# Altium PCB CtrlBoxV2.PcbDoc
Units mil, origin at the board's own origin, x right, y up, seen from the top; angles counter-clockwise.
Board outline 2165.35 x 2165.35 mil, 2 copper layers (Component Side, Bottom Layer), stack 65.756 mil thick; 29 components, 27 nets, 116 pads, 11 vias.
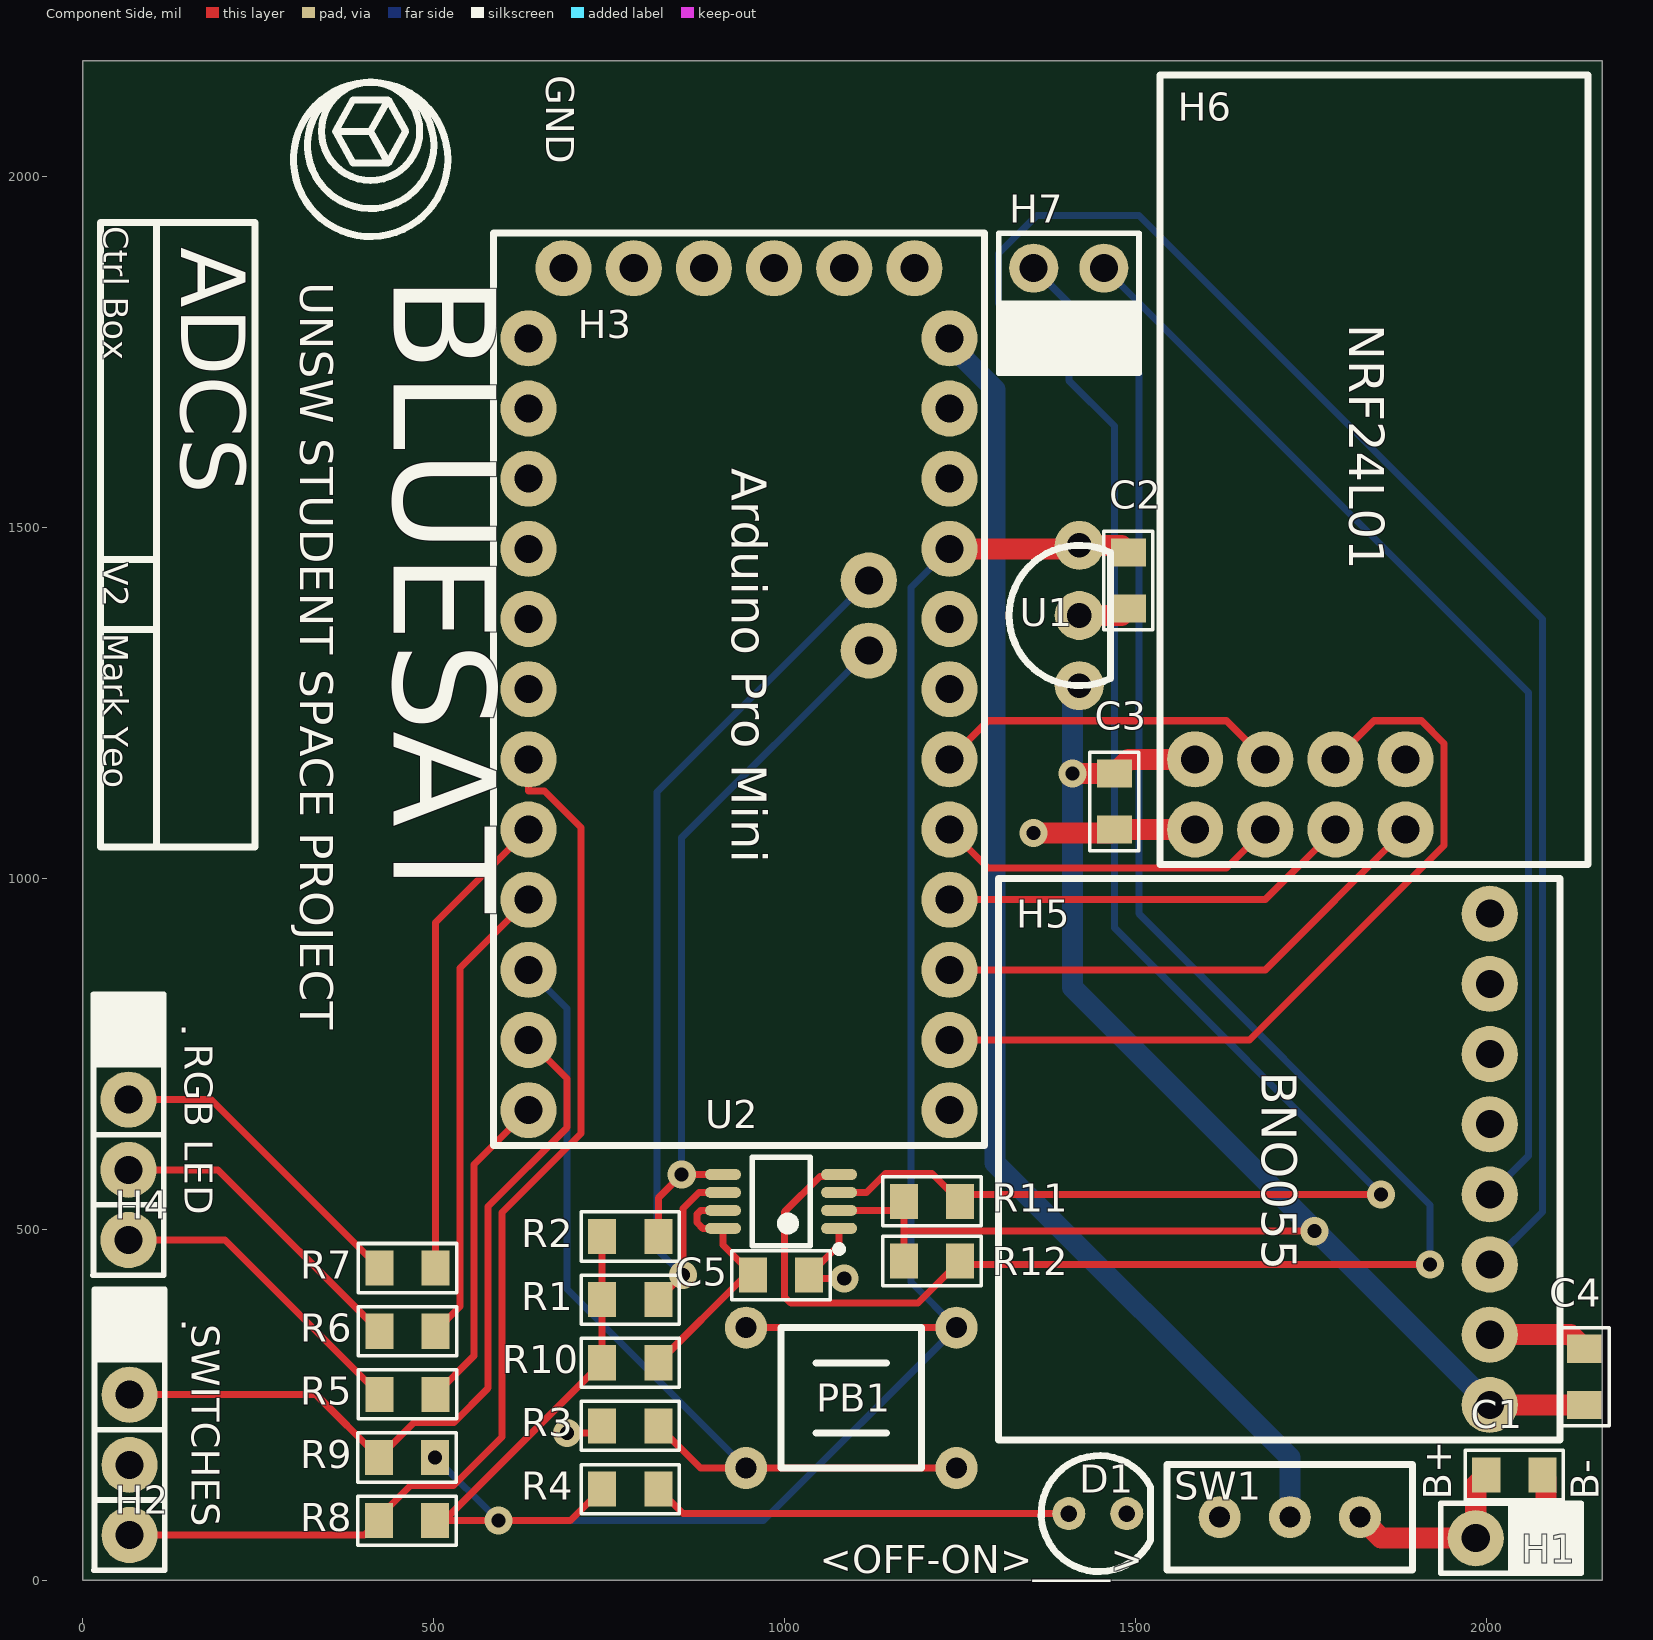
[diagram p0: Component Side view]
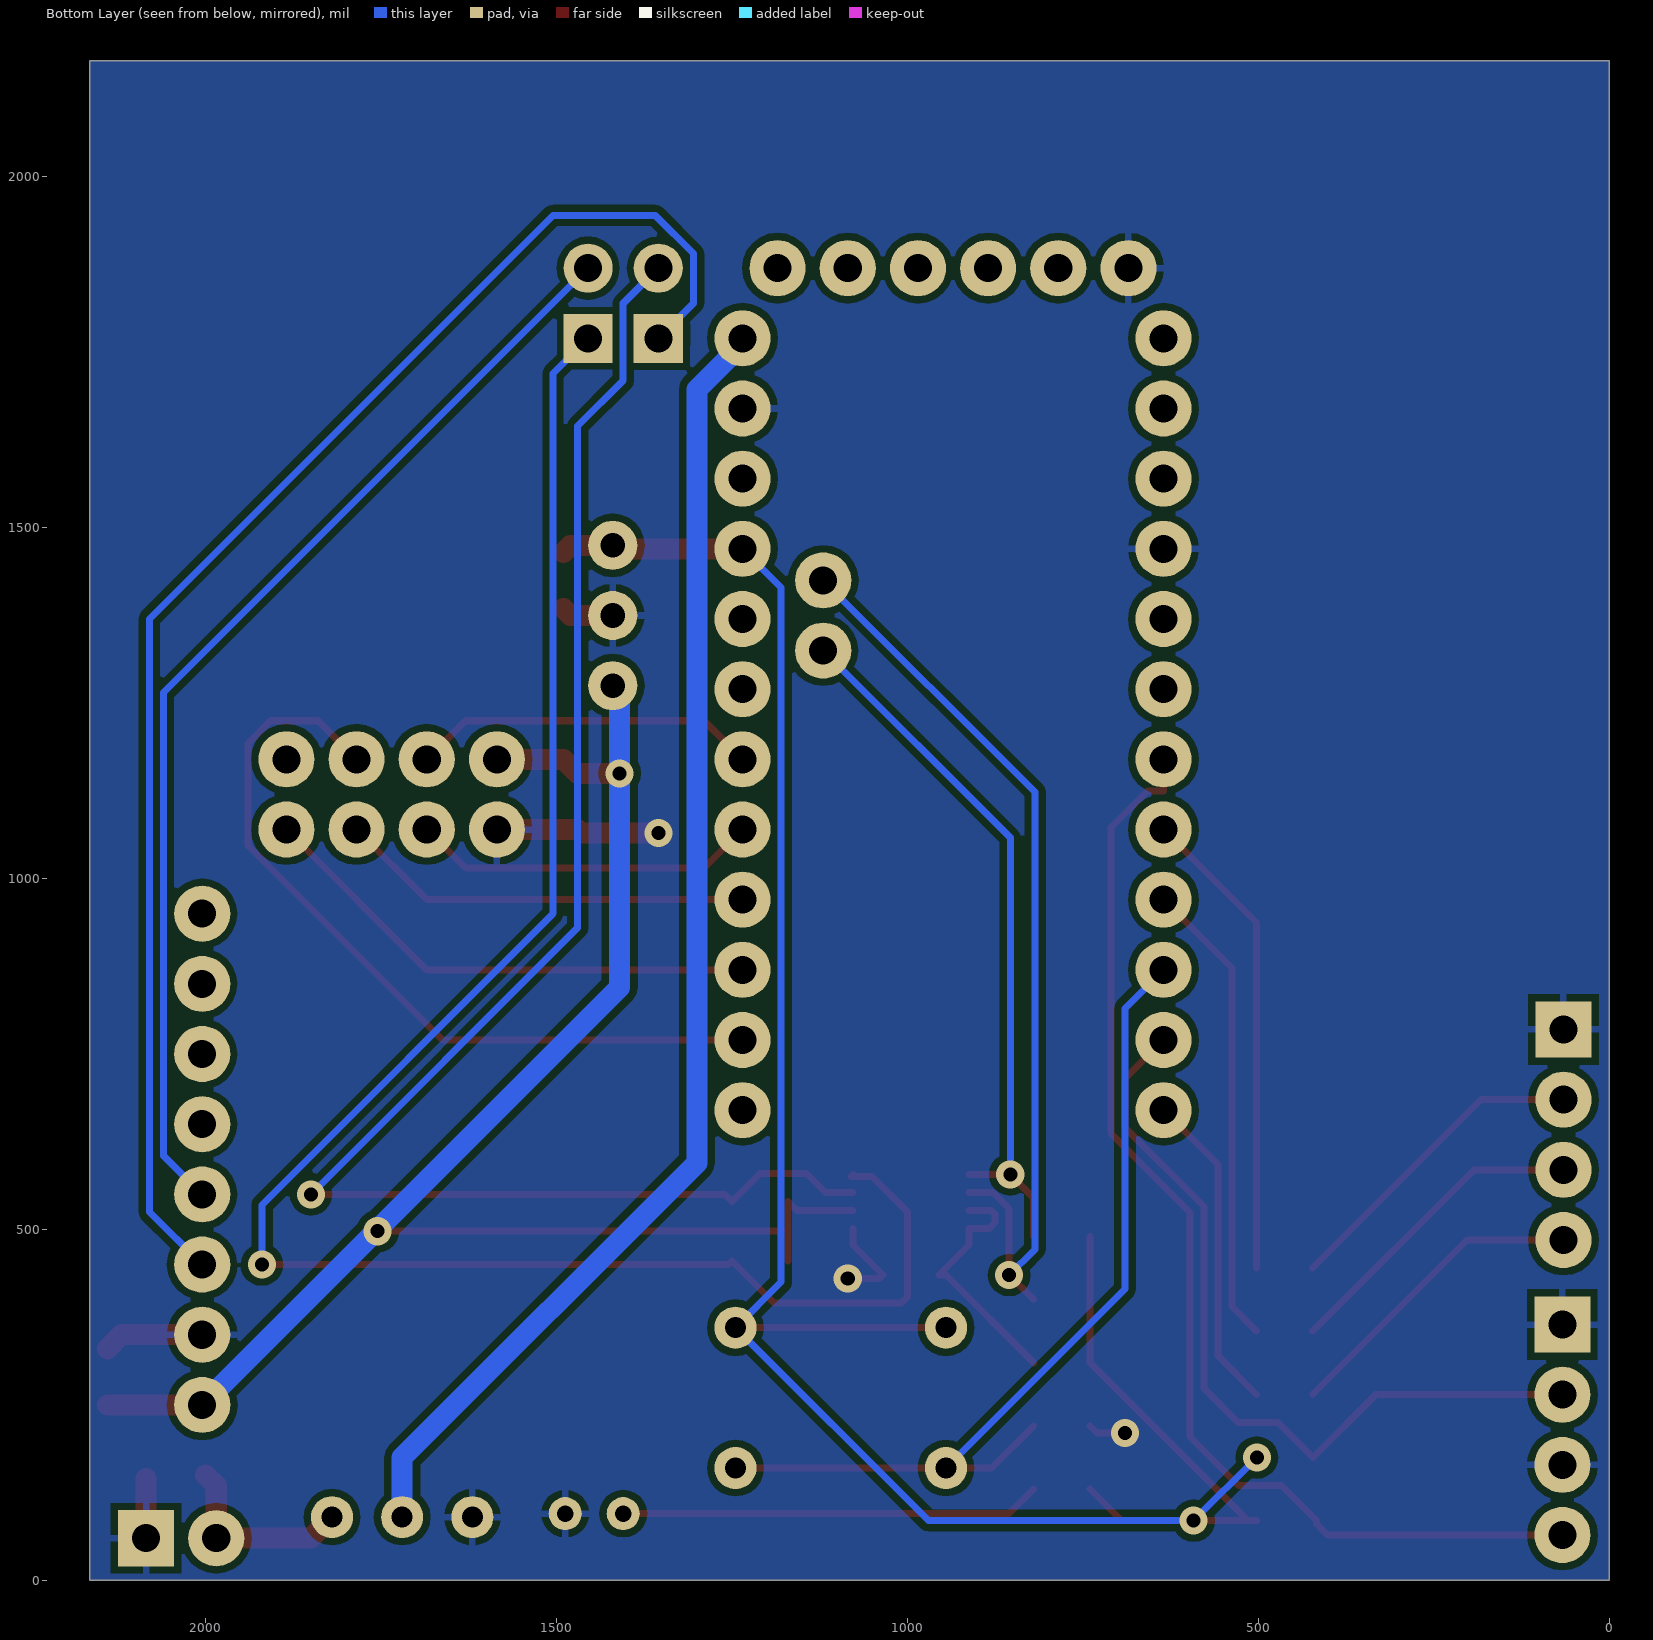
[diagram p1: Bottom Layer view, seen from below]

## Layer stack, top to bottom
Top Solder: solder mask 0.394, Solder Resist, Dk 3.5
Component Side: signal copper 1.378
Dielectric 1: core 63, FR-4, Dk 4.2
Bottom Layer: signal copper 1.378
Solder Side: solder mask 0.394, Solder Resist, Dk 3.5

## Board outline
0,0 2165.35,0 2165.35,2165.35 0,2165.35

## Design rules (kind name [scope] priority, off if disabled: settings)
Clearance [All] p1: gap=10
Clearance "Clearance (Same Net)" [All] p2: gap=0 except(8: SMDPad-SMDPad SMDPad-THPad SMDPad-Via)
ComponentClearance [All] p1: gap=0 collisioncheckmode=3 verticalgap=0 showdistances=FALSE
HoleSize HoleSize_1 [All] p1: absolutevalues=TRUE maxlimit=100000 minlimit=24 maxpercent=80.000 minpercent=20.000
HoleSize [All] p2: absolutevalues=TRUE maxlimit=100 minlimit=1 maxpercent=80.000 minpercent=20.000
HoleToHoleClearance mdViaViaSameLayer [All] p1: gap=8 allowstackedmicrovias=TRUE
HoleToHoleClearance [All] p2: gap=10 allowstackedmicrovias=TRUE
PasteMaskExpansion mlMinCreamFrame [All] p1: expansion=0
PasteMaskExpansion [All] p2: expansion=0
PlaneConnect PlaneConnect_1 [All] p1: planeconnectstyle=Relief reliefexpansion=20 reliefentries=4 reliefconductorwidth=10 reliefairgap=10
PlaneConnect PlaneConnect_2 [IsVia AND InNet('GND')] p2: planeconnectstyle=Direct reliefexpansion=20 reliefentries=4 reliefconductorwidth=10 reliefairgap=10
PolygonConnect ThermalVias [IsVia] p1: connectstyle=Direct reliefconductorwidth=10 reliefentries=4 polygonreliefangle="90 Angle" airgapwidth=10
PolygonConnect [All] p2: connectstyle=Relief reliefconductorwidth=10 reliefentries=4 polygonreliefangle="90 Angle" airgapwidth=10
RoutingVias [All] p1: holewidth=28 width=50 viastyle="Through Hole" minholewidth=28 minwidth=50 maxholewidth=28 maxwidth=50
SilkToSilkClearance [All] p1 off: silktosilkclearance=10
SilkToSolderMaskClearance [IsPad] p1 off: minsilkscreentomaskgap=10 clearancetoexposedcopper=TRUE
SolderMaskExpansion mlMinStopFrame [All] p1: expansion=4
SolderMaskExpansion [All] p2: expansion=4
Width Width_1 [All] p1: maxlimit=100000 minlimit=6 preferedwidth=10
Width [All] p2: maxlimit=10 minlimit=8 preferedwidth=10
23 further rules are at their usual default settings.

## Components (designator, comment, footprint, x,y, rotation, side; value= is the part's Value field where it differs from the comment)
C1 "100nF" 0805C-TBD 2070,150 r180 top
C2 "100nF" 0805C-TBD 1490,1455 r270 top
C3 "10uF" 0805C-GENERIC 1470,1080 r90 top
C4 "10uF" 0805C-GENERIC 2140,260 r90 top
C5 "10uF" 0805C-GENERIC 965,435 r0 top
D1 "LED" LED 1405,95 r90 top
H1 "HEADER-1X2" HEADER-1X2 2085,60 r270 top
H2 "HEADER-1X4" HEADER-1X4 66.5,364.5 r0 top
H3 "Arduino Pro Mini" "Arduino Pro Mini" 635,1770 r0 top
H4 "HEADER-1X4" HEADER-1X4 65,785 r0 top
H5 "BNO055" BNO055 2005,250 r180 top
H6 "NRF24L01" NRF24L01 1585,1070 r90 top
H7 "HEADER-2X2" HEADER-2X2 1455,1770 r180 top
PB1 "PushButton" PushButton 1245,360 r180 top
R1 "4K7" 0805R-4K7 750,400 r0 top
R2 "4K7" 0805R-4K7 750,490 r0 top
R3 "4K7" 0805R-4K7 810,220 r180 top
R4 "150R" 0805R-150 750,130 r0 top
R5 "150R" 0805R-150 492.5,265 r180 top
R6 "150R" 0805R-150 492.5,355 r180 top
R7 "150R" 0805R-150 492.5,445 r180 top
R8 "4K7" 0805R-4K7 492,85 r180 top
R9 "4K7" 0805R-4K7 492,175 r180 top
R10 "200K" 0805R-4K7 810,310 r180 top
R11 "4K7" 0805R-4K7 1180,540 r0 top
R12 "4K7" 0805R-4K7 1180,455 r0 top
SW1 "ToggleSwitch" SWITCHFOOTPRINT 1620,90 r270 top
U1 "LM2936" LM2936 1420,1275 r90 top
U2 "PCA9306" PCA9306 995,540 r180 top

## Footprints (in the part's own frame and the unit in brackets; to place one, negate y for a bottom-side part, rotate by r counter-clockwise, add the part's x,y. Pads: shape width x height; smd on the part's side, far side on the other; paste and mask are expansions set on the pad)
0805C-GENERIC [mil] "CAPACITOR 0805"
  rect 40x50 smd: 1(-10,0) 2(70,0)
  silkscreen extent -40,-35 100,35, body extent -11,-25 70,25, height 26
0805C-TBD [mil] "CAPACITOR 0805"
  rect 40x50 smd: 1(-10,0) 2(70,0)
  silkscreen extent -40,-35 100,35, body extent -11,-25 70,25, height 26
0805R-4K7 [mil] "RESISTOR 0805"
  rect 40x50 smd: 1(-10,0) 2(70,0)
  silkscreen extent -40,-35 100,35, body extent -11,-25 70,25, height 27
0805R-150 [mil] "RESISTOR 0805"
  rect 40x50 smd: 1(-10,0) 2(70,0)
  silkscreen extent -40,-35 100,35, body extent -11,-25 70,25, height 27
"Arduino Pro Mini" [mil]
  round 80 hole 40: 1(0,0) 2(0,-100) 3(0,-200) 4(0,-300) 5(0,-400) 6(0,-500) 7(0,-600) 8(0,-700) 9(0,-800) 10(0,-900) 11(0,-1000) 12(0,-1100) 13(600,0) 14(600,-100) 15(600,-200) 16(600,-300) 17(600,-400) 18(600,-500) 19(600,-600) 20(600,-700) 21(600,-800) 22(600,-900) 23(600,-1000) 24(600,-1100) 25(485,-345) 26(485,-445) 27(50,100) 28(150,100) 29(250,100) 30(350,100) 31(450,100) 32(550,100)
  silkscreen extent -50,-1150 650,150
BNO055 [mil]
  round 80 hole 40: 1(0,0) 2(0,-100) 3(0,-200) 4(0,-300) 5(0,-400) 6(0,-500) 7(0,-600) 8(0,-700)
  silkscreen extent -100,-750 700,50
HEADER-1X2 [mil]
  rect 80x80 hole 40: 1(0,0)
  round 80 hole 40: 2(0,-100)
  silkscreen extent -50,-150 50,50, body extent -50,-150 50,50, height 470
HEADER-1X4 [mil]
  rect 80x80 hole 40: 1(0,0)
  round 80 hole 40: 2(0,-100) 3(0,-200) 4(0,-300)
  silkscreen extent -51,-350 50,50, body extent -50,-350 50,50, height 470
HEADER-2X2 [mil]
  rect 70x70 hole 40: 1(0,0) 2(100,0)
  round 70 hole 40: 3(0,-100) 4(100,-100)
  silkscreen extent -50,-150 150,50, body extent -50,-150 150,50, height 470
LED [mm]
  round 1.2 hole 0.6: 1(0,0) 2(0,-2.1)
  silkscreen extent -2.1,-2.96 2.1,1
LM2936 [mil]
  round 70 hole 35: 1(0,0) 2(100,0) 3(200,0)
  silkscreen extent 0,-45 200,100
NRF24L01 [mil]
  round 80 hole 40: 1(0,0) 2(0,-100) 3(0,-200) 4(0,-300) 5(100,-300) 6(100,-200) 7(100,-100) 8(100,0)
  silkscreen extent -50,-560 1075,50
PCA9306 [mm] "Dual Bidirectional I2C Voltage Shifter"
  oval 1.3x0.4 smd: 1(-2.1,0.975) 2(-2.1,0.325) 3(-2.1,-0.325) 4(-2.1,-0.975) 5(2.1,-0.975) 6(2.1,-0.325) 7(2.1,0.325) 8(2.1,0.975)
  silkscreen extent -2.23,-1.6 1.05,1.85, body extent -2,-1.6 2,1.6, height 1.4
PushButton [mil]
  round 60 hole 30: 5(0,0) 6(300,0) 7(0,200) 8(300,200)
  silkscreen extent 50,0 250,200, body extent 50,0 250,200, height 300
SWITCHFOOTPRINT [mil]
  round 60 hole 30: 2(0,0) 3(0,100) 4(0,200)
  silkscreen extent -75,-75 75,275, body extent -75,-75 75,275, height 300

## Part data
C1 C2: library part 0805C-100nF-25V-X7R-MUR, "CAPACITOR 0805 CERAMIC"
C3 C4 C5: library part 0805C-10UF-16V-X5R-TDK, "CAPACITOR 0805 CERAMIC"
D1: "Small LED"
H5: "Accel+Gyro+Mag"
H6: "Radio Transceiver"
R1 R2 R3 R8 R9 R10 R11 R12: library part 0805R-4K7, "RESISTOR 0805 1/4 WATT THIN FILM"
R4 R5 R6 R7: library part 0805R-150, "RESISTOR 0805 1/4 WATT THIN FILM"
U1: "3V3 Voltage Regulator"
U2: "Dual Bidirectional I2C Voltage Level Translator"

## Via types
v1: diameter 40, hole 20, Component Side to Bottom Layer, 11 vias

## Nets (pads, with @x,y where several pads share a name; then routed paths per layer and width w, separated by ;. In a path a pad name is that pad's centre, name@x,y a point inside that pad or via, vN(x,y) a via of type N, cw(c..) or ccw(c..) an arc to the next point about the centre after c; other vN are vias at no path point)
3V3: C3.2 C4.1 H5.1 H6.8 R11.1 R12.1 U1.1 U2.2 | length 2361.5
  Component Side w10: U2.2 1157.2,527.2 R11.1 1170,497.5 ; R12.1 1170,497.5 ; v1(1755,497.5) 1170,497.5
  Component Side w30: v1(1410,1150) C3.2 1490,1170 H6.8 ; H5.1 C4.1
  Bottom Layer w30: U1.1 1410,1265 v1(1410,1150) 1410,845 H5.1
6V_IN: H3.13 SW1.3 | length 1878.5
  Bottom Layer w30: H3.13@1230.96,1765.96 1300,1696.92 1300,595 1720,175 SW1.3
CE_NRF: H3.20 H6.2 | length 495.6
  Component Side w10: H3.20 1290,1015 1630,1015 H6.2
CS_NRF: H3.19 H6.7 | length 495.6
  Component Side w10: H3.19 1290,1225 1630,1225 H6.7
GND: C1.1 C2.2 C3.1 C4.2 C5.2 D1.2 H1.1 H2.1 H2.3 H3.4 H3.14 H3.27 H4.1 H5.2 H6.1 R3.2 SW1.2 U1.2 U2.1 | length 725
  Component Side w10: v1(690,210) 730,210 R3.2 ; U2.1 1077.68,477.68 C5.2 1040,430 v1(1085,430)
  Component Side w30: v1(1355,1065) 1465,1065 C3.1 H6.1 ; U1.2 1480,1375 C2.2 ; H5.2 2120,350 C4.2 ; H1.1 C1.1@2085,145
LED_B: H3.12 R5.1 | length 459.9
  Component Side w10: R5.1 557.5,320 557.5,592.5 H3.12
LED_G: H3.9 R6.1 | length 669.9
  Component Side w10: R6.1 537.5,390 537.5,872.5 H3.9
LED_R: H3.8 R7.1 | length 679.9
  Component Side w10: R7.1 502.5,937.5 H3.8
MISO: H3.22 H6.4 | length 732.8
  Component Side w10: H3.22 1685,870 H6.4
MOSI: H3.23 H6.6 | length 1156.5
  Component Side w10: H3.23 1662.78,770 1940,1047.22 1940,1192.78 1907.78,1225 1840,1225 H6.6
NetC1_2: C1.2 H1.2 SW1.4 | length 273.6
  Component Side w30: SW1.4 1850,60 H1.2 1985,135 C1.2
NetC5_1: C5.1 R10.1 U2.7 U2.8 | length 363.2
  Component Side w10: R10.1 945,435 C5.1 912.32,477.68 U2.8 883.39,501.61 875,510 875,521.72 880.49,527.2 U2.7
NetD1_1: D1.1 R4.2 | length 599.5
  Component Side w10: R4.2 855,95 D1.1
NetH4_2: H4.2 R7.2 | length 456.9
  Component Side w10: H4.2 182.5,685 R7.2
NetH4_3: H4.3 R6.2 | length 452.8
  Component Side w10: H4.3 192.5,585 R6.2
NetH4_4: H4.4 R5.2 | length 448.6
  Component Side w10: H4.4 202.5,485 R5.2
PUSH_BUTTON: H3.10 PB1.7 PB1.8 R3.1 | length 1288.3
  Component Side w10: R3.1 880,160 PB1.8 PB1.7
  Bottom Layer w10: H3.10 690,815 690,415 PB1.8
SCK: H3.21 H6.3 | length 591.4
  Component Side w10: H3.21 1685,970 H6.3
SCL: H3.25 R1.2 U2.6 | length 1341.4
  Component Side w10: R1.2 v1(855,435) 855,530 877.8,552.8 U2.6
  Bottom Layer w10: v1(855,435) 818.39,471.61 818.39,1123.39 H3.25
SCL_3V3: H7.4 R11.2 U2.3 | length 2329.3
  Component Side w10: U2.3 1116.58,552.8 1143.79,580 1210,580 R11.2 1260,550 v1(1850,550)
  Bottom Layer w10: H7.4 1405,1820 1405,1710 1470,1645 1470,930 v1(1850,550)
SDA: H3.26 R2.2 U2.5 | length 1018.2
  Component Side w10: R2.2 820,545 v1(853.39,578.39) U2.5
  Bottom Layer w10: v1(853.39,578.39) 853.39,1058.39 H3.26
SDA_3V3: H7.1 R12.2 U2.4 | length 2689.7
  Component Side w10: U2.4 1080.39,575.67 1050.49,575.67 1000,525.18 1000,403.79 1008.79,395 1190,395 R12.2 1255,450 v1(1920,450)
  Bottom Layer w10: H7.1 1505,1720 1505,950 1920,535 v1(1920,450)
SW_LEFT: H2.2 H3.11 R9.2 | length 1154.6
  Component Side w10: H2.2 332.5,264.5 R9.2 472,225 528.71,225 577.5,273.79 577.5,532.5 690,645 690,715 H3.11
SW_RIGHT: H2.4 H3.7 R8.2 | length 1648.6
  Component Side w10: H2.4 401.5,64.5 417,80 417,85 467,135 528.21,135 597.5,204.29 597.5,524.22 710,636.72 710,1072.78 657.78,1125 635,1125 H3.7
SXX_3V3: H5.3 H7.2 | length 2157.4
  Bottom Layer w10: H7.2@1325,1760 H7.2@1325,1789.29 ; H7.2 1305,1820 1305,1890.71 1359.29,1945 1505,1945 2080,1370 2080,525 H5.3
SYY_3V3: H5.4 H7.3 | length 1596.3
  Bottom Layer w10: H7.3@1460,1875 1460,1865 2060,1265 2060,605 H5.4
VCC: C2.1 H3.16 PB1.5 PB1.6 R1.1 R2.1 R4.1 R8.1 R9.1 R10.2 U1.3 | length 3377.9
  Component Side w10: R8.1 R8.1@515,85 ; R4.1 695,85 R8.1@515,85 ; R2.1 R1.1 R10.2 R8.1@515,85 ; PB1.6 PB1.5
  Component Side w30: H3.16 U1.3@1420,1470 ; U1.3 1480,1475 C2.1
  Bottom Layer w10: v1(502,175) v1(592,85) 970,85 PB1.5 1180,425 1180,1415 H3.16 H3.16@1235,1480
pads on no net: H3.1 H3.2 H3.3 H3.5 H3.6 H3.15 H3.17 H3.18 H3.24 H3.28 H3.29 H3.30 H3.31 H3.32 H5.5 H5.6 H5.7 H5.8 H6.5

## Polygon pours and split planes (outlines as drawn)
GND on Bottom Layer "Bottom Layer-GND" (solid, pour order 0): 0,0 2165.35,0 2165.35,2165.35 0,2165.35

## Silkscreen, mask and mechanical layers (free items; w line width, h text height)
Top Overlay:
  circle w10: c410,2025 r110
  circle w10: c410,2045 r90
  circle w10: c410,2065 r70
  lines w10: 25,1355 105,1355 ; 25,1455 105,1455 ; 105,1045 105,1935 ; 360,2065 385,2020 435,2020 ; 360,2065 385,2110 435,2110 ; 360,2065 410,2065 ; 410,2065 435,2020 ; 410,2065 435,2110 ; 435,2020 460,2065 435,2110 ; 25,1045 245,1045 245,1935 25,1935 25,1045
  text "GND" at 660,2145 h40 r270
  text "Ctrl Box" at 30,1930 h35 r270
  text "ADCS" at 110,1900 h157.48 r270
  text "BLUESAT" at 395,1860 h250 r270
  text "UNSW STUDENT SPACE PROJECT" at 310,1850 h47.24 r270
  text "V2" at 30,1450 h35 r270
  text "Mark Yeo" at 30,1350 h35 r270
  text "." at 135,780 h40
  text "RGB LED" at 145,765 h40 r270
  text "SWITCHES" at 155,365 h40 r270
  text "." at 135,360 h40
  text "B+" at 1950,115 h40 r90
  text "B-" at 2160,115 h40 r90
  text "<OFF-ON>____>" at 1050,10 h40
Mechanical 1:
  the board outline again, w10